# EAGLE board PlusCartUnified (EAGLE 9.6.2)
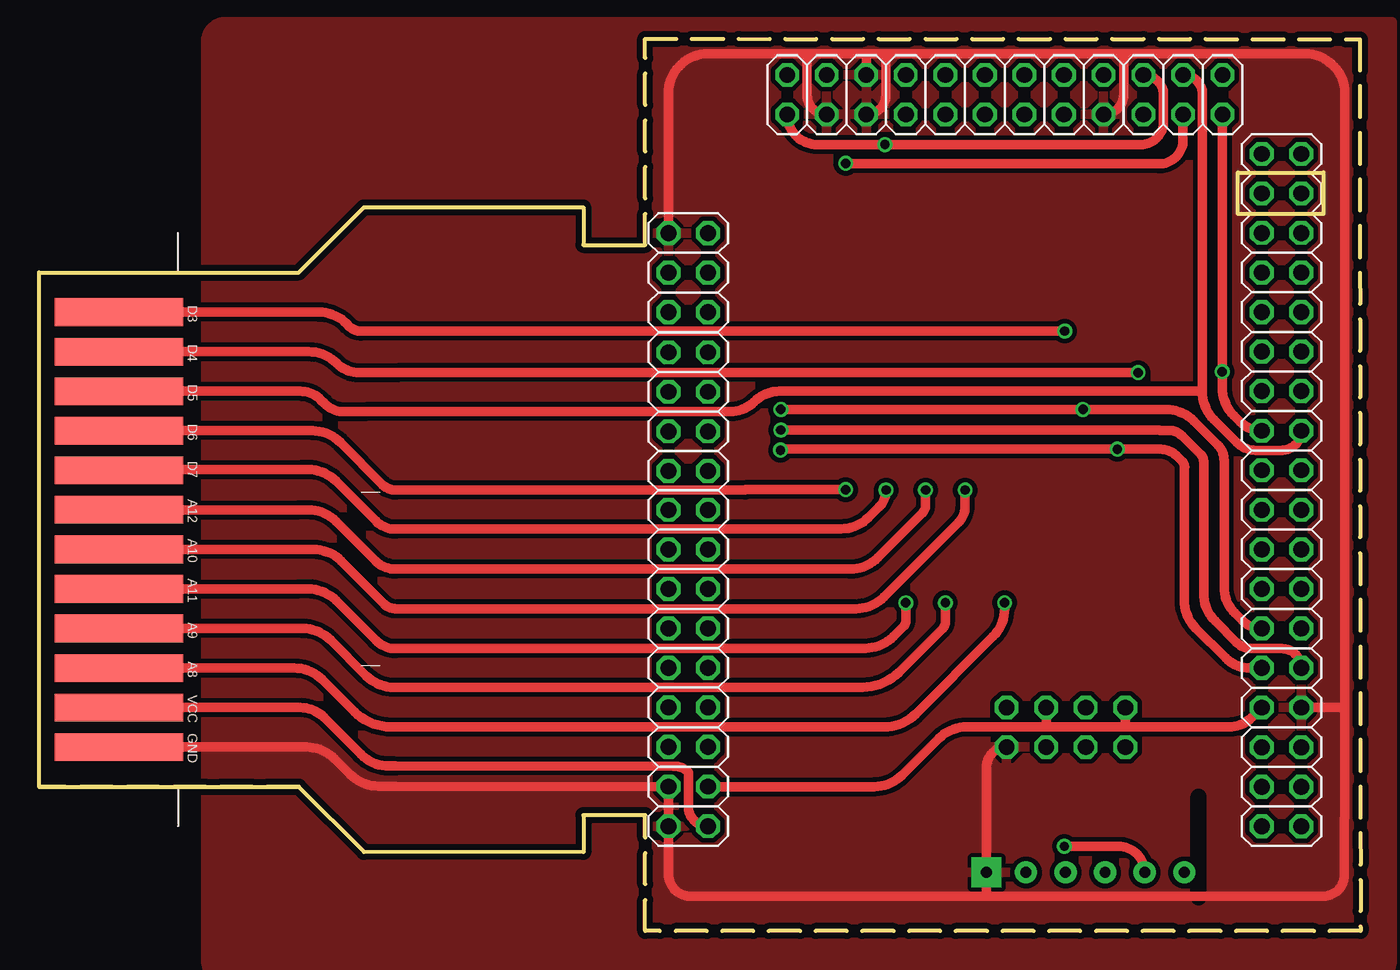
[diagram p0: board, top side]
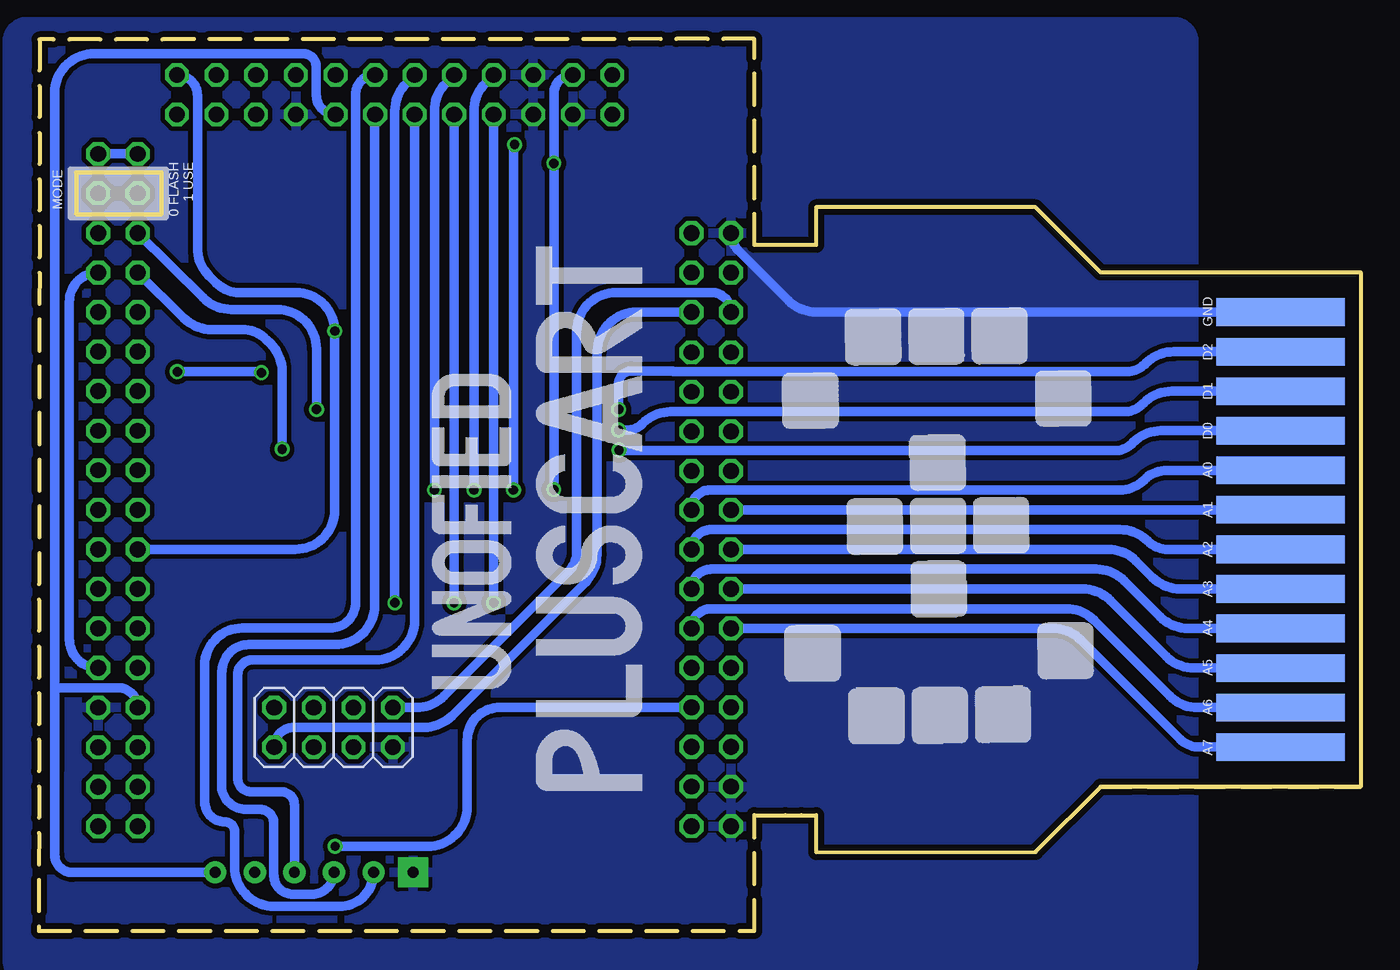
[diagram p1: board, bottom side, seen from below]

Size 84.89 x 57.3 mm. Coordinates in mm from the lower left corner, seen from the top.
Outline: 38.94,7.44 34.98,7.44
Outline: 34.98,7.44 34.98,5.05 20.88,5.08 16.69,9.27
Outline: 0,9.27 0,42.29 16.69,42.29 20.88,46.48 34.98,46.48 34.98,44.07 38.94,44.07 38.94,57.3 84.84,57.28 84.89,0 38.94,0 38.94,7.44
Outline: 0,9.27 16.69,9.27
Outline: 38.94,7.44 34.98,7.44
Outline: 16.69,9.27 0,9.27
Copper layers (1*16): Top 0.0356mm / dielectric 1.5011mm / Bottom 0.0356mm
Design rules "OSHPark2layer": minimum track width 6mil, minimum drill 13mil, track to track 6mil, track to pad 6mil, pad to pad 6mil, via to via 6mil, smd to smd 6mil, copper to edge 15mil, drill to drill 6mil, minimum pad ring 7mil, minimum via ring 7mil, stop-mask expansion 3mil, vias tented up to drill 0mil, thermal gap 10mil
tRestrict: area 74.5,2.2 to 74.5,8.6
Milling: 4 lines

## Footprints (pad centres in the part's own frame; a part is rotated, then mirrored left to right if it is on the bottom)
24PINEDGE-254MM = smd 1.778 x 8.255: 1-A -22.86,-7.62; 2-A -20.32,-7.62; 3-A -17.78,-7.62; 4-A -15.24,-7.62; 5-A -12.7,-7.62; 6-A -10.16,-7.62; 7-A -7.62,-7.62; 8-A -5.08,-7.62; 9-A -2.54,-7.62; 10-A 0,-7.62; 11-A 2.54,-7.62; 12-A 5.08,-7.62 | smd 1.778 x 8.255 bottom: 1-B -22.86,-7.62; 2-B -20.32,-7.62; 3-B -17.78,-7.62; 4-B -15.24,-7.62; 5-B -12.7,-7.62; 6-B -10.16,-7.62; 7-B -7.62,-7.62; 8-B -5.08,-7.62; 9-B -2.54,-7.62; 10-B 0,-7.62; 11-B 2.54,-7.62; 12-B 5.08,-7.62
2X02 = drill 1.016 octagon: 1 -1.27,-1.27; 2 -1.27,1.27; 3 1.27,-1.27; 4 1.27,1.27
2X04 = drill 1.016 octagon: 1 -3.81,-1.27; 2 -3.81,1.27; 3 -1.27,-1.27; 4 -1.27,1.27; 5 1.27,-1.27; 6 1.27,1.27; 7 3.81,-1.27; 8 3.81,1.27
2X03 = drill 1.016 octagon: 1 -2.54,-1.27; 2 -2.54,1.27; 3 0,-1.27; 4 0,1.27; 5 2.54,-1.27; 6 2.54,1.27
2X09 = drill 1.016 octagon: 1 -10.16,-1.27; 2 -10.16,1.27; 3 -7.62,-1.27; 4 -7.62,1.27; 5 -5.08,-1.27; 6 -5.08,1.27; 7 -2.54,-1.27; 8 -2.54,1.27; 9 0,-1.27; 10 0,1.27; 11 2.54,-1.27; 12 2.54,1.27; 13 5.08,-1.27; 14 5.08,1.27; 15 7.62,-1.27; 16 7.62,1.27; 17 10.16,-1.27; 18 10.16,1.27
2X08 = drill 1.016 octagon: 1 -8.89,-1.27; 2 -8.89,1.27; 3 -6.35,-1.27; 4 -6.35,1.27; 5 -3.81,-1.27; 6 -3.81,1.27; 7 -1.27,-1.27; 8 -1.27,1.27; 9 1.27,-1.27; 10 1.27,1.27; 11 3.81,-1.27; 12 3.81,1.27; 13 6.35,-1.27; 14 6.35,1.27; 15 8.89,-1.27; 16 8.89,1.27
2X07 = drill 1.016 octagon: 1 -7.62,-1.27; 2 -7.62,1.27; 3 -5.08,-1.27; 4 -5.08,1.27; 5 -2.54,-1.27; 6 -2.54,1.27; 7 0,-1.27; 8 0,1.27; 9 2.54,-1.27; 10 2.54,1.27; 11 5.08,-1.27; 12 5.08,1.27; 13 7.62,-1.27; 14 7.62,1.27
MICROSD_FOOTPRINT = drill 0.7 pad 1.422: 3V3 -13.97,6.35; CLK -13.97,-1.27; CS -13.97,3.81; MISO -13.97,-3.81; MOSI -13.97,1.27 | drill 0.7 pad 1.93 square: GND -13.97,-6.35

## Placement (x,y rotation side)
CON3  A2600  [24PINEDGE-254MM]  12.75,34.67 90 bottom
JP1  0  [2X02]  41.71,8 270 top
JP2  0  [2X04]  41.71,23.24 270 top
JP3  0  [2X03]  41.71,42.29 270 top
JP4  0  [2X09]  58.22,53.72 180 top
JP5  0  [2X08]  79.81,23.24 90 top
JP6  0  [2X04]  65.96,13.08 0 bottom
JP7  0  [2X03]  41.71,14.36 270 top
JP8  0  [2X04]  41.71,33.36 270 top
JP9  0  [2X03]  79.81,9.26 270 top
JP10  0  [2X03]  73.48,53.72 0 top
JP11  0  [2X07]  79.81,42.3 270 top
U$1  MICROSD2MICROSD2  [MICROSD_FOOTPRINT]  67.21,-10.21 270 top

## Library data of the parts
CON3 = con-edge
JP1-JP11 = pinhead
U$1 = MICROSD

## Nets
+3V3: JP1.2 JP4.4 JP5.2 JP6.2 JP6.6 U$1.3V3
A0: CON3.8-A JP2.2
A1: CON3.7-A JP2.1
A2: CON3.6-A JP2.4
A3: CON3.5-A JP2.3
A4: CON3.4-A JP2.6
A5: CON3.3-A JP2.5
A6: CON3.2-A JP2.8
A7: CON3.1-A JP2.7
A8: CON3.3-B JP4.7
A9: CON3.4-B JP4.10
A10: CON3.6-B JP4.9
A11: CON3.5-B JP4.12
A12: CON3.7-B JP4.11
CLK: JP4.6 U$1.CLK
CS: JP7.4 U$1.CS
D0: CON3.9-A JP5.4 JP11.7
D1: CON3.10-A JP5.3 JP11.8
D2: CON3.11-A JP5.6 JP11.5
D3: CON3.12-B JP5.10 JP10.6
D4: CON3.11-B JP5.16 JP10.5
D5: CON3.10-B JP5.15 JP10.4
D6: CON3.9-B JP4.15 JP10.3
D7: CON3.8-B JP4.18 JP10.2
GND: CON3.1-B CON3.12-A JP1.1 JP1.3 JP3.1 JP4.2 JP4.13 JP4.14 JP4.16 JP5.1 JP6.7 U$1.GND
MISO: JP4.5 U$1.MISO
MOSI: JP4.8 U$1.MOSI
SHORT: JP11.1 JP11.2
USART1_RX: JP3.5 JP6.8
USART1_TX: JP3.6 JP6.1
VCC: CON3.2-B JP1.4

## Tracks (layer width: path | path; a pad name or v marks a point on that pad's centre or on a via)
+3V3
  Top 0.61: JP1.2 53.66,9.27 arc45 55.44,10.01 57.8,12.36 arc-45 59.59,13.11 64.67,13.11 | 64.67,13.11 69.77,13.11 | 69.77,13.11 76.43,13.11 arc45 77.9,13.72 JP5.2 | JP6.2 69.77,13.11 | JP6.6 64.69,13.17 arc-45 64.67,13.11
  Bottom 0.61: JP4.4 arc90 67.07,53.68 67.07,55.5 arc-90 67.94,56.36 81.33,56.36 arc-90 83.87,53.83 83.87,15.62 | 83.87,15.62 83.87,10.37 arc90 83.87,10.36 83.87,4.9 arc-90 82.73,3.76 U$1.3V3 | JP5.2 arc-90 79.81,15.62 83.87,15.62
A0
  Bottom 0.61: JP2.2 42.98,27.12 arc90 41.77,28.33 15.47,28.33 arc-45 13.89,28.98 arc45 12.42,29.59 CON3.8-A
A1
  Bottom 0.61: JP2.1 CON3.7-A
A2
  Bottom 0.61: JP2.4 arc90 41.71,25.78 15.45,25.78 arc45 13.66,25.04 arc-45 12.39,24.51 CON3.6-A
A3
  Bottom 0.61: JP2.3 16.22,24.51 arc45 14.42,23.77 13.37,22.71 arc-45 11.57,21.97 CON3.5-A
A4
  Bottom 0.61: JP2.6 arc90 41.71,23.24 16.98,23.24 arc45 15.18,22.5 12.86,20.18 arc-45 11.06,19.43 CON3.4-A
A5
  Bottom 0.61: JP2.5 17.87,21.97 arc45 16.07,21.23 12.48,17.63 arc-45 10.68,16.89 CON3.3-A
A6
  Bottom 0.61: JP2.8 arc90 41.71,20.7 18.91,20.7 arc45 17.11,19.96 12.25,15.1 arc-45 10.45,14.35 CON3.2-A
A7
  Bottom 0.61: JP2.7 19.75,19.43 arc45 17.95,18.69 11.58,12.32 arc-45 10.36,11.81 CON3.1-A
A8  (via drill 0.6)
  Top 0.61: CON3.3-B 16.4,16.89 arc-45 18.19,16.15 20.26,14.08 arc45 22.6,13.11 54.28,13.11 arc45 56.32,13.95 61.28,18.92 arc45 62.03,20.71 v62.03,21.08
  Bottom 0.61: JP4.7 61.28,54.47 arc-45 62.03,52.67 v62.03,21.08
A9  (via drill 0.6)
  Top 0.61: v58.22,21.08 58.22,19.84 arc-45 58.05,19.45 55.23,16.62 arc-45 52.89,15.65 22.91,15.65 22.82,15.65 arc-45 21.02,16.39 18.73,18.69 arc45 16.93,19.43 CON3.4-B
  Bottom 0.61: JP4.10 v58.22,21.08
A10  (via drill 0.6)
  Top 0.61: v59.49,28.32 59.49,27.28 arc-45 59.06,26.24 54.26,21.45 arc-45 52.47,20.7 22.91,20.7 arc-45 22.17,21.01 19.41,23.77 arc45 17.62,24.51 CON3.6-B
  Bottom 0.61: JP4.9 58.74,54.47 arc-45 59.49,52.67 v59.49,28.32
A11  (via drill 0.6)
  Top 0.61: v55.68,21.08 55.68,19.89 arc-45 55.55,19.59 54.87,18.91 arc-45 53.07,18.16 22.97,18.16 arc45 22.91,18.14 arc-45 21.65,18.66 19.08,21.23 arc45 17.29,21.97 16.7,21.97 CON3.5-B
  Bottom 0.61: JP4.12 v55.68,21.08
A12  (via drill 0.6)
  Top 0.61: v56.95,28.32 56.95,27.33 arc-45 56.75,26.85 53.88,23.98 arc-45 52.08,23.24 22.91,23.24 arc-45 21.61,23.78 19.08,26.31 arc45 17.29,27.05 16.71,27.05 CON3.7-B
  Bottom 0.61: JP4.11 56.2,54.47 arc-45 56.95,52.67 v56.95,28.32
CLK
  Bottom 0.61: JP4.6 arc-45 63.32,52.4 63.32,20.94 arc90 65.86,18.39 71.42,18.39 arc-90 73.11,16.7 arc-90 73.16,16.65 73.16,9.39 arc-90 71.59,7.81 70.68,7.81 arc90 69.8,6.93 69.8,3.58 arc-90 68.58,2.36 67.34,2.36 arc-90 U$1.CLK
CS  (via drill 0.6)
  Top 0.61: v65.86,5.44 69.34,5.44 arc-90 U$1.CS
  Bottom 0.61: JP7.4 55.28,14.36 arc-90 57.38,12.26 57.38,7.98 arc90 59.92,5.44 v65.86,5.44
D0  (via drill 0.6)
  Top 0.61: v47.62,30.89 47.68,30.95 v69.27,30.95 72.05,30.95 arc-45 73.05,30.53 73.44,30.14 arc-45 73.58,29.79 arc45 73.56,29.73 73.56,21.24 arc45 74.3,19.45 76.23,17.53 arc45 77.76,16.89 JP5.4
  Bottom 0.61: v47.62,30.89 47.59,30.85 15.77,30.85 arc-45 14.71,31.29 14.61,31.39 arc45 12.82,32.13 CON3.9-A | v69.27,30.95 69.27,35.93 arc-45 70.01,37.73 70.28,38 arc-45 71.81,38.63 73.79,38.63 arc45 75.58,39.38 JP11.7
D1  (via drill 0.6)
  Top 0.61: JP5.3 arc90 79.83,18.14 77.9,18.14 arc-45 76.9,18.55 75.55,19.91 arc-45 74.8,21.7 74.8,30.18 arc45 74.62,30.61 73.43,31.8 arc45 72.57,32.16 72.01,32.16 arc-45 71.95,32.18 v47.65,32.18
  Bottom 0.61: JP5.3 arc90 82.93,18.74 82.93,40.41 arc90 JP11.8 | CON3.10-A 12.13,34.67 arc-45 13.93,33.93 14.02,33.83 arc45 15.19,33.35 44.31,33.35 arc-45 46.11,32.61 46.18,32.54 arc45 47.04,32.18 v47.65,32.18
D2  (via drill 0.6)
  Top 0.61: v47.65,33.5 v67.06,33.5 72.38,33.5 arc-45 74.18,32.76 75.72,31.22 arc-45 76.12,30.23 76.12,22.08 arc45 76.81,20.42 77.28,19.95 arc45 JP5.6
  Bottom 0.61: JP11.5 74.34,40.67 arc-45 72.54,39.93 69.6,39.93 arc90 67.06,37.39 v67.06,33.5 | v47.65,33.5 47.65,35.18 arc90 46.86,35.97 44.18,35.97 arc90 44.16,35.94 14.97,35.94 arc-45 13.87,36.4 13.8,36.47 arc45 12,37.21 CON3.11-A
D3  (via drill 0.6)
  Top 0.61: v65.89,38.53 20.67,38.53 arc-45 19.94,38.84 19.77,39.01 arc45 17.97,39.75 CON3.12-B
  Bottom 0.61: JP5.10 68.42,24.51 arc-90 65.88,27.05 65.88,38.51 arc-45 v65.89,38.53 arc-90 68.36,41 72.03,41 arc45 73.49,41.61 73.96,42.08 arc45 74.7,43.88 74.7,53.66 arc-90 JP10.6
D4  (via drill 0.6)
  Top 0.61: JP5.16 arc-45 77.15,32.71 76.74,33.11 arc-45 76,34.91 v76,35.93 arc45 76.02,35.98 JP10.5 | v70.6,35.86 23.04,35.86 20.58,35.86 arc-45 19.15,36.45 19.13,36.47 arc45 17.34,37.21 CON3.11-B
  Bottom 0.61: v70.6,35.86 arc-45 70.77,35.93 v76,35.93
D5
  Top 0.61: JP5.15 arc-90 79.82,30.88 78.16,30.88 arc-45 76.95,31.38 75.46,32.86 arc-45 74.71,34.66 74.71,34.67 | JP10.4 arc-90 74.73,53.74 74.73,34.69 arc-90 74.71,34.67 | 74.71,34.67 47.58,34.67 arc45 45.92,33.98 arc-45 44.39,33.35 20.98,33.35 20.65,33.35 19.63,33.35 arc-45 18.34,33.88 18.11,34.11 arc45 16.76,34.67 CON3.10-B
D6  (via drill 0.6)
  Top 0.61: v51.82,28.35 45.39,28.35 45.36,28.32 22.91,28.32 arc-45 22.09,28.66 19.36,31.39 arc45 17.57,32.13 CON3.9-B | JP10.3 73.48,50.81 arc-90 71.95,49.28 51.86,49.28 arc-90 v51.82,49.31
  Bottom 0.61: v51.82,28.35 v51.82,49.31 51.82,53.77 arc90 JP4.15
D7  (via drill 0.6)
  Top 0.61: v54.41,28.32 arc-45 53.96,27.24 53.29,26.57 arc-45 51.51,25.83 22.97,25.83 arc45 22.91,25.81 arc-45 21.65,26.33 19.08,28.9 arc45 17.29,29.64 16.76,29.64 16.38,29.64 5.25,29.64 arc45 CON3.8-B | JP4.18 arc90 49.99,50.52 v54.34,50.52 70.76,50.52 arc90 72.23,51.98 72.23,53.7 arc90 JP10.2
  Bottom 0.61: v54.41,28.32 54.41,50.45 arc-90 v54.34,50.52
GND
  Top 0.61: 83.87,14.45 83.87,7.25 arc90 83.85,7.23 83.85,3.58 arc-90 82.5,2.23 60.71,2.23 | JP5.1 83.77,14.35 arc90 83.87,14.45 | 83.87,14.45 83.87,53.81 arc90 81.33,56.36 69.68,56.36 | 69.68,56.36 54.41,56.36 | 54.41,56.36 53.19,56.36 | JP4.2 arc90 69.68,53.75 69.68,56.36 | JP3.1 40.44,53.81 arc-90 42.98,56.36 49.33,56.36 | 49.33,56.36 53.19,56.36 | JP4.13 53.14,56.3 arc-90 53.19,56.36 | JP4.16 arc-90 49.33,53.72 49.33,56.36 | JP4.14 arc90 54.41,53.72 54.41,56.36 | CON3.1-B 17.18,11.81 arc-45 18.98,11.07 20.01,10.04 arc45 21.8,9.3 22.91,9.3 JP1.1 JP1.3 40.44,3.63 arc90 41.83,2.23 60.71,2.23 | JP6.7 arc90 60.86,10.52 U$1.GND 60.86,2.39 arc-90 60.71,2.23
  Bottom 0.61: JP3.1 arc-45 39.99,43.75 36.74,40.5 arc-45 34.94,39.75 CON3.12-A
  pour Top (isolate 0.305): 10.72,-1.27 10.72,57.15 arc-90 11.99,58.42 86.92,58.42 86.92,-1.91 arc-90 85.65,-3.18 83.74,-3.18 11.99,-3.18 arc-90 10.72,-1.91
  pour Bottom (isolate 0.305): 10.72,57.15 10.72,-1.91 arc90 11.99,-3.18 79.93,-3.18 85.65,-3.18 arc90 86.92,-1.91 86.92,55.25 86.92,57.15 arc90 85.65,58.42 13.89,58.42 11.99,58.42 arc90
MISO
  Bottom 0.61: JP4.5 arc-90 64.55,53.74 64.55,21.09 arc90 66.19,19.45 71.84,19.45 arc-90 74.24,17.05 74.24,8.29 arc-90 72.97,7.02 arc90 72.31,6.36 72.31,4.12 arc-90 69.77,1.58 65.58,1.58 arc-90 U$1.MISO
MOSI
  Bottom 0.61: JP4.8 60.76,19.95 arc90 63.3,17.41 71.17,17.41 arc-90 72.12,16.46 72.12,9.79 arc-90 71.27,8.94 69.32,8.94 arc90 68.48,8.1 U$1.MOSI
SHORT
  Bottom 0.61: JP11.1 JP11.2
USART1_RX
  Bottom 0.61: JP3.5 arc-90 41.71,41.02 47.8,41.02 arc-90 50.34,38.48 50.34,24.38 arc45 50.88,23.08 58.87,15.1 arc45 60.67,14.35 JP6.8
USART1_TX
  Bottom 0.61: JP6.1 arc90 68.5,13.08 60.16,13.08 arc-45 58.36,13.82 49.79,22.39 arc-45 49.05,24.19 arc-45 49.03,24.23 49.03,37.21 arc90 46.49,39.75 JP3.6
VCC
  Top 0.61: JP1.4 arc-90 41.71,8 arc45 41.71,8 41.71,10.2 arc45 40.77,10.59 22.91,10.59 22.49,10.59 arc-45 20.69,11.34 18.32,13.7 arc45 16.76,14.35 CON3.2-B

## Text on the board
tNames: D3 | D4 | D5 | D6 | D7 | A12 | A10 | A11 | A9 | A8 | VCC | GND
bNames: 0 FLASH / 1 USE | MODE | GND | D2 | D1 | D0 | A0 | A1 | A2 | A3 | A4 | A5 | A6 | A7